# Altium PCB AutoReverse2.PcbDoc
Units mm, origin at the board's own origin, x right, y up, seen from the top; angles counter-clockwise.
Board outline 68.83 x 48.9 mm, 2 copper layers (Top Layer, Bottom Layer); 20 components, 16 nets, 56 pads, 11 vias.
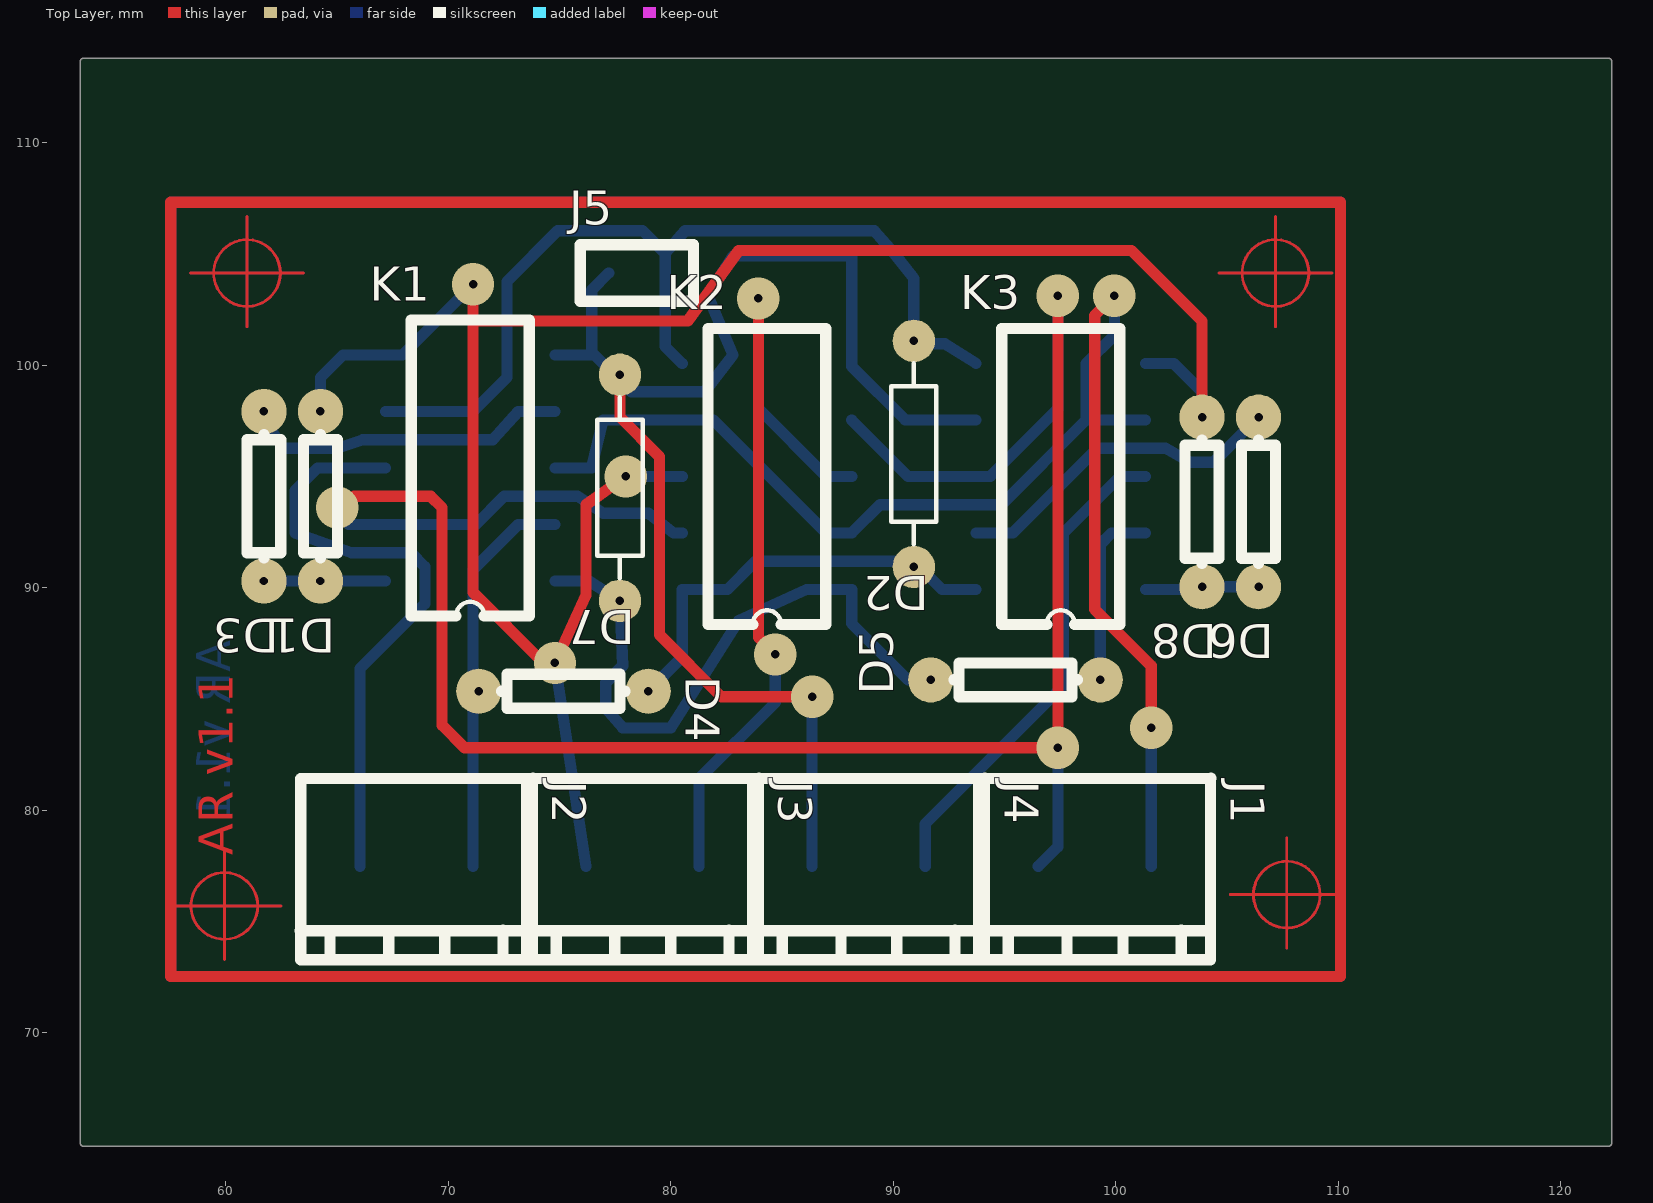
[diagram p0: Top Layer view]
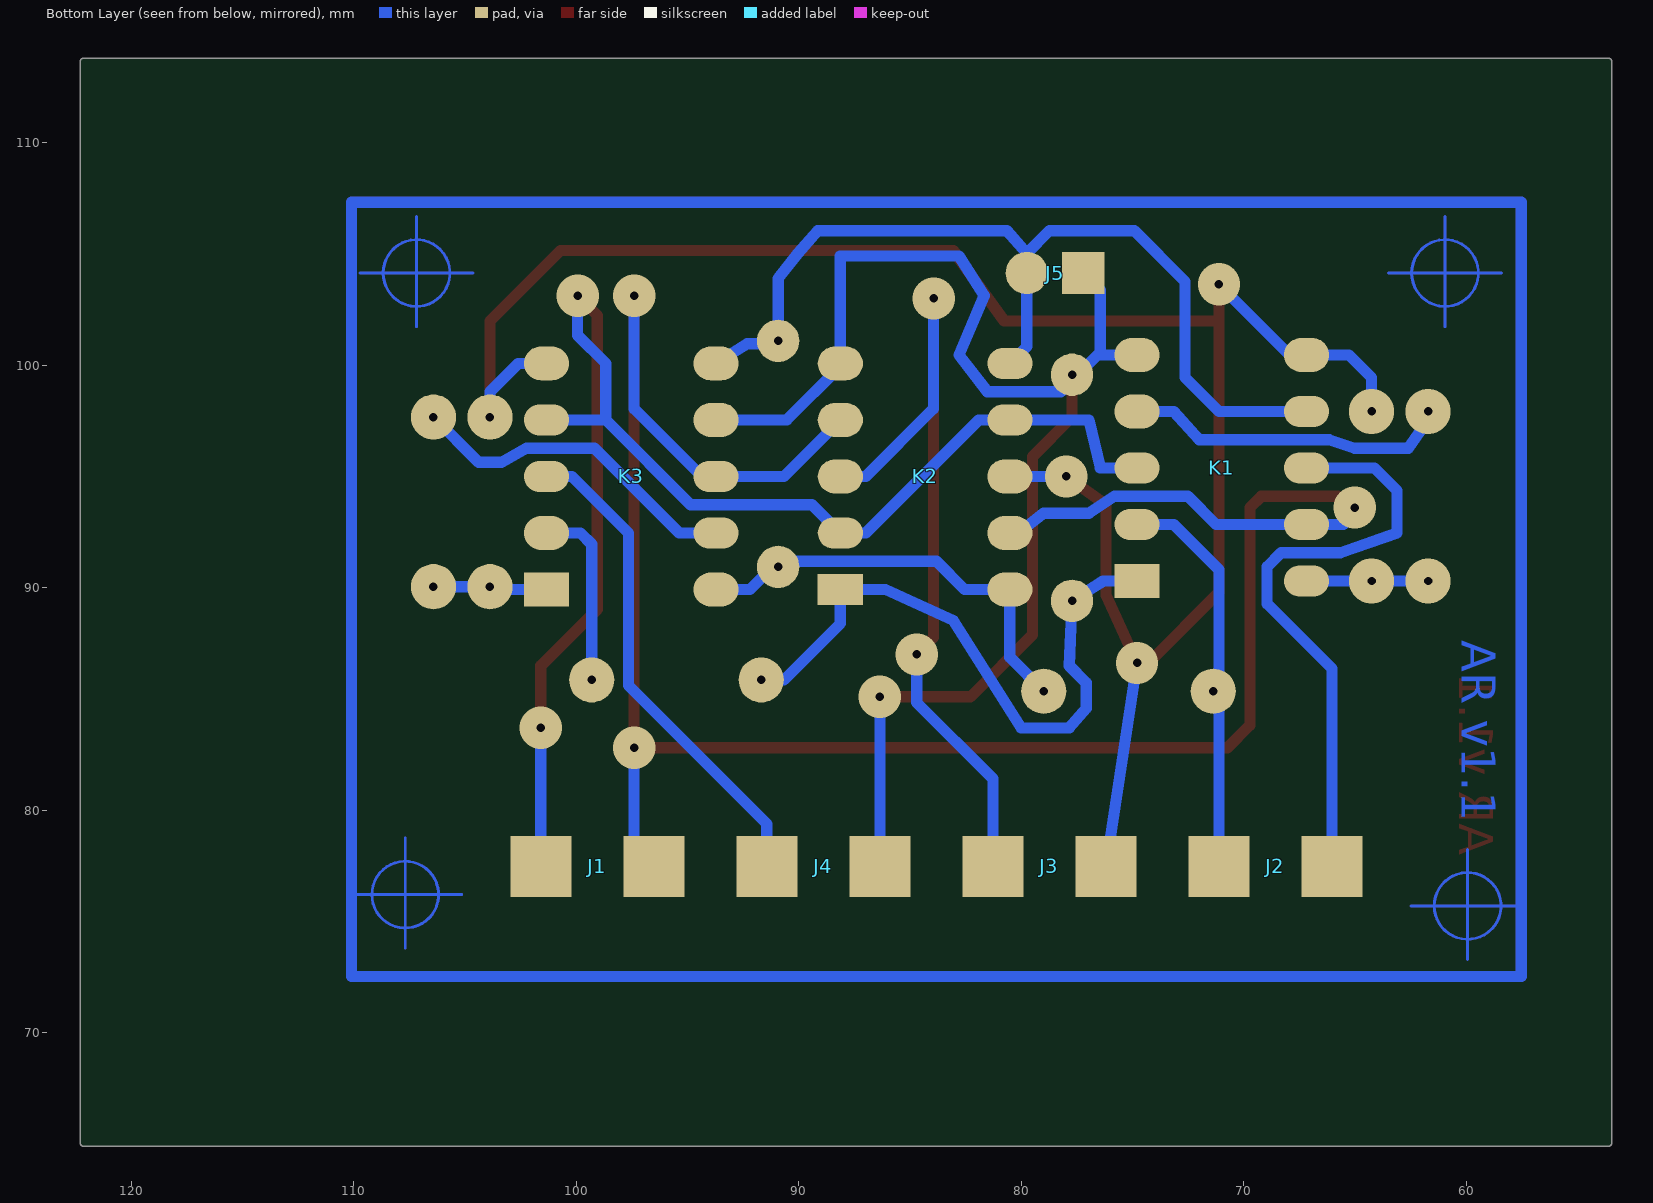
[diagram p1: Bottom Layer view, seen from below]

## Layer stack, top to bottom
Top Layer: signal copper 0.0356
Dielectric: dielectric 0.32, FR-4, Dk 4.8
Bottom Layer: signal copper 0.0356

## Board outline
53.594,64.897 cw(c53.594,65.024) 53.467,65.024 53.467,113.665 cw(c53.594,113.665) 53.594,113.792 122.174,113.792 cw(c122.174,113.665) 122.301,113.665 122.301,65.024 cw(c122.174,65.024) 122.174,64.897

## Design rules (kind name [scope] priority, off if disabled: settings)
Clearance [All] p1: gap=0.305
ComponentClearance [All] p1: gap=0.254 collisioncheckmode=0
PolygonConnect [All] p1: connectstyle=Relief reliefconductorwidth=0.254 reliefentries=4 polygonreliefangle="90 Angle"
RoutingLayers [All] p1: top layer=Horizontal bottom layer=Vertical
RoutingVias [All] p1: holewidth=0.711 width=1.27 viastyle="Through Hole" minholewidth=0.711 minwidth=1.27 maxholewidth=0.711 maxwidth=1.27
SolderMaskExpansion [All] p1: expansion=0.102
TestPointUsage [All] p1: valid=0 allowmultiple=FALSE
Testpoint [All] p1: side=15 testpointundercomponent=TRUE minsize=1.016 maxsize=2.54 preferedsize=1.524 minholesize=0 maxholesize=1.016 preferedholesize=0.813 testpointgrid=0.025 style=1023 order=1234567890
Width [All] p1: maxlimit=1.27 minlimit=0.254 preferedwidth=0.508 bottomlayer_prefwidth=0.254 minimp=50.000000 maximp=50.000000 favimp=50.000000
16 further rules are at their usual default settings.

## Classes and differential pairs
component class AutoReverse2: D1 D2 D3 D4 D5 D6 D7 D8 J1 J2 J3 J4 J5 K1 K2 K3

## Components (designator, comment, footprint, x,y, rotation, side; value= is the part's Value field where it differs from the comment)
D1 "Diode 1N4001" AXIAL-0.3 64.262,94.107 r270 top
D2 "Diode 1N4001" AXIAL-0.4 90.932,96.012 r270 top
D3 "Diode 1N4001" AXIAL-0.3 61.722,94.107 r270 top
D4 "Diode 1N4001" AXIAL-0.3 75.184,85.344 r0 top
D5 "Diode 1N4001" AXIAL-0.3 95.504,85.852 r180 top
D6 "Diode 1N4001" AXIAL-0.3 106.426,93.853 r270 top
D7 "Diode 1N4001" AXIAL-0.4 77.724,94.488 r270 top
D8 "Diode 1N4001" AXIAL-0.3 103.886,93.853 r270 top
J1 "Main Track" "Screw Terminal 2 way 0.2" 93.98,74.93 r270 top
J2 "West" "Screw Terminal 2 way 0.2" 63.5,74.93 r270 top
J3 "Center" "Screw Terminal 2 way 0.2" 73.66,74.93 r270 top
J4 "East" "Screw Terminal 2 way 0.2" 83.82,74.93 r270 top
J5 "SIP2 CONNECTOR" HDR1X2 77.216,104.14 r0 top
K1 "West Relay" DIP-10#1 70.993,95.377 r90 top
K2 "Reversing Relay" DIP-10#2 84.328,94.996 r90 top
K3 "East Relay" DIP-10#3 97.536,94.996 r90 top
? "" Crosshair 107.696,76.2 r270 top
? "" Crosshair 59.944,75.692 r270 top
? "" Crosshair 60.96,104.14 r270 top
? "" Crosshair 107.188,104.14 r270 top

## Footprints (in the part's own frame and the unit in brackets; to place one, negate y for a bottom-side part, rotate by r counter-clockwise, add the part's x,y. Pads: shape width x height; smd on the part's side, far side on the other; paste and mask are expansions set on the pad)
AXIAL-0.3 [mil]
  round 80 hole 15: 1(-150,0) 2(150,0)
  silkscreen extent -109,-30 109,30
AXIAL-0.4 [mil]
  round 75 hole 15: 1(-200,0) 2(200,0)
  silkscreen extent -160,-40 160,40
Crosshair [mm] "Mounting Hole pad"
  Multi-Layer circle w0.127: c0,0 r1.5
  Multi-Layer lines w0.127: 0,-2.54 0,2.54 ; 2.413,0 -2.54,0
DIP-10#1 [mil]
  rect 60x80 smd far side: 1(-200,-150)
  oval 55x80 smd far side: 2(-100,-150) 3(0,-150) 7(100,150) 8(0,150) 9(-100,150) 10(-200,150)
  oval 60x80 smd far side: 4(100,-150) 5(200,-150) 6(200,150)
  silkscreen extent -262,-104 262,104
DIP-10#2 [mil]
  rect 55x80 smd far side: 1(-200,-150)
  oval 55x80 smd far side: 2(-100,-150) 6(200,150) 7(100,150)
  oval 60x80 smd far side: 3(0,-150) 4(100,-150) 5(200,-150) 8(0,150) 9(-100,150) 10(-200,150)
  silkscreen extent -262,-104 262,104
DIP-10#3 [mil]
  rect 60x80 smd far side: 1(-200,-150)
  oval 60x80 smd far side: 2(-100,-150) 5(200,-150) 6(200,150) 7(100,150) 10(-200,150)
  oval 55x80 smd far side: 3(0,-150) 4(100,-150) 8(0,150) 9(-100,150)
  silkscreen extent -262,-104 262,104
HDR1X2 [mil] "Connector; Header; 2 Position"
  rect 75x75 smd far side: 1(0,0)
  round 75 smd far side: 2(100,0)
  silkscreen extent -50,-50 150,50
"Screw Terminal 2 way 0.2" [mm]
  rect 2.75x2.75 smd far side: 1(-2.54,7.62) 2(-2.54,2.54)
  silkscreen extent -6.5,-0.15 1.65,10.31

## Part data
D1 D2 D3 D4 D5 D6 D7 D8: "1 Amp General Purpose Rectifier"
J1 J2 J3 J4: library part "Screw Terminal 2 Way"
K1 K2 K3: library part "EA2-5T Dual Coil 5V Latching Relay", "EA2-5T Dual Coil 5V Latching Relay"

## Via types
v1: diameter 1.905, hole 0.381, Top Layer to Bottom Layer, 11 vias

## Nets (pads, with @x,y where several pads share a name; then routed paths per layer and width w, separated by ;. In a path a pad name is that pad's centre, name@x,y a point inside that pad or via, vN(x,y) a via of type N, cw(c..) or ccw(c..) an arc to the next point about the centre after c; other vN are vias at no path point)
N: J1.2 K1.9 K2.4 K2.9 K3.8 | length 102.6
  Top Layer w0.508: v1(65.024,93.599) 65.786,94.107 69.215,94.107 69.723,93.599 69.723,83.82 70.739,82.804 v1(97.409,82.804) v1(97.409,103.124)
  Bottom Layer w0.508: v1(65.024,93.599) 65.532,92.837 71.247,92.837 72.517,94.107 75.819,94.107 76.962,93.345 78.994,93.345 80.137,92.456 K2.9 ; K2.4 90.678,94.996 94.361,94.996 97.409,98.044 v1(97.409,103.124) ; J1.2 97.409,78.359 v1(97.409,82.804)
NetD1_1: D1.1 D8.1 J3.2 K1.6 K2.8 K3.5 | length 94.6
  Top Layer w0.508: 71.12,101.981 80.772,101.981 83.058,105.156 93.345,105.156 96.647,105.156 100.711,105.156 103.886,101.981 D8.1 ; v1(71.12,103.632) 71.12,89.789 74.295,86.614 v1(74.803,86.614) 76.2,89.662 76.2,93.726 v1(77.978,94.996)
  Bottom Layer w0.508: D1.1 64.262,99.441 65.278,100.457 67.945,100.457 v1(71.12,103.632) ; v1(74.803,86.614) J3.2 ; v1(77.978,94.996) K2.8 ; K3.5 102.616,100.076 103.886,98.806 D8.1
NetD1_2: D1.2 D3.2 K1.10 | length 5.5
  Bottom Layer w0.508: D3.2 K1.10
NetD2_1: D2.1 J5.2 K1.7 K2.6 K3.6 | length 42.8
  Bottom Layer w0.508: K1.7 71.12,97.917 72.644,99.441 72.644,103.759 74.93,106.045 78.74,106.045 J5.2@79.756,105.029 ; K2.6 79.756,100.838 J5.2@79.756,105.029 ; K3.6 92.329,100.965 90.932,100.965 90.932,103.886 90.043,105.029 89.154,106.045 80.645,106.045 J5.2@79.756,105.029
NetD2_2: D2.2 D4.2 K2.10 K3.10 | length 19.5
  Bottom Layer w0.508: D4.2 80.518,86.868 K2.10 82.55,89.916 83.82,91.186 90.932,91.186 92.202,89.916 K3.10
NetD3_1: D3.1 K1.4 | length 14.8
  Bottom Layer w0.508: D3.1 61.722,97.536 62.611,96.266 65.024,96.266 66.167,96.647 72.009,96.647 73.152,97.917 K1.4
NetD4_1: D4.1 J2.1 K1.2 | length 17.9
  Bottom Layer w0.508: J2.1 71.12,90.805 73.152,92.837 K1.2
NetD5_1: D5.1 K3.2 | length 8.3
  Bottom Layer w0.508: D5.1 99.314,91.948 99.822,92.456 K3.2
NetD5_2: D5.2 D7.2 K1.1 K2.1 | length 28.9
  Bottom Layer w0.508: K1.1 76.327,90.297 D7.2 77.851,86.487 77.089,85.725 77.089,84.582 77.851,83.693 80.01,83.693 83.058,88.519 86.106,89.916 K2.1 88.138,88.392 90.678,85.852 D5.2
NetD6_1: D6.1 K3.9 | length 15.3
  Bottom Layer w0.508: K3.9 95.377,92.456 99.187,96.266 102.235,96.266 103.378,95.631 104.394,95.631 D6.1
NetD6_2: D6.2 D8.2 K3.1 | length 5.2
  Bottom Layer w0.508: K3.1 D8.2@104.013,89.916 ; D8.2 D6.2
NetD7_1: D7.1 J4.2 J5.1 K1.5 K2.5 K3.7 | length 63.2
  Top Layer w0.508: D7.1@77.724,99.314 77.724,97.663 79.502,95.885 79.502,87.884 82.296,85.09 v1(86.36,85.09)
  Bottom Layer w0.508: K1.5 76.581,100.457 78.232,98.806 81.534,98.806 82.804,100.457 81.661,103.124 82.804,104.902 88.138,104.902 88.138,101.981 K2.5 88.138,99.949 90.551,97.536 K3.7 ; 76.454,100.457 76.454,103.378 J5.1 ; J4.2 v1(86.36,85.09)
NetJ2_2: J2.2 K1.8 | length 27.3
  Bottom Layer w0.508: J2.2 66.04,86.36 68.961,89.281 68.961,90.932 68.326,91.567 65.659,91.567 63.119,92.456 63.119,94.361 64.135,95.377 66.548,95.377 K1.8
NetJ3_1: J3.1 K2.3 | length 37.7
  Top Layer w0.508: v1(83.947,102.997) 83.947,87.757 v1(84.709,86.995)
  Bottom Layer w0.508: J3.1 81.28,81.407 84.709,84.836 v1(84.709,86.995) ; v1(83.947,102.997) 83.947,98.044 86.995,94.996 K2.3
NetJ4_1: J4.1 K3.3 | length 22.3
  Bottom Layer w0.508: J4.1 91.44,79.375 97.663,85.598 97.663,92.456 100.203,94.996 K3.3
S: J1.1 K1.3 K2.2 K2.7 K3.4 | length 65.6
  Top Layer w0.508: v1(99.949,103.124) 99.06,102.235 99.06,89.027 101.6,86.487 v1(101.6,83.693)
  Bottom Layer w0.508: K1.3 76.454,95.377 76.962,97.536 78.613,97.536 81.915,97.536 86.995,92.456 K2.2 89.408,93.726 94.869,93.726 98.679,97.536 ; v1(99.949,103.124) 99.949,101.346 98.679,100.076 98.679,97.536 ; K3.4 98.679,97.536 ; J1.1 v1(101.6,83.693)
copper on no net: | length 191.9
  Bottom Layer w0.254: 43.815,49.911 44.323,48.387 ; 43.815,146.863 44.323,148.387 ; 44.069,48.387 44.577,48.387 ; 44.069,148.387 44.577,148.387 ; 44.323,92.648 44.323,48.387 ; 44.323,104.126 44.323,148.387 ; 44.831,49.911 44.323,48.387 ; 44.831,146.863 44.323,148.387 ; 47.879,124.333 47.879,124.841 ; 49.403,124.079 47.879,124.587 ; 49.403,125.095 47.879,124.587 ; 92.14,124.587 47.879,124.587 ; 103.618,124.587 147.879,124.587 ; 146.355,124.079 147.879,124.587 ; 146.355,125.095 147.879,124.587 ; 147.879,124.333 147.879,124.841

## Other copper
Top Layer:
  text "AR v1.1" at 60.325,77.978 h1.52 r90
Bottom Layer:
  text "100 (mm)" at 92.394,123.673 h1.52
  text "100 (mm)" at 45.237,92.902 h1.52 r90
  text "AR v1.1" at 60.198,87.63 h1.52 r90
Multi-Layer:
  lines w0.508: 57.531,72.517 110.109,72.517 110.109,107.315 57.531,107.315 57.531,72.517